# Allegro board kvp_03v4.brd
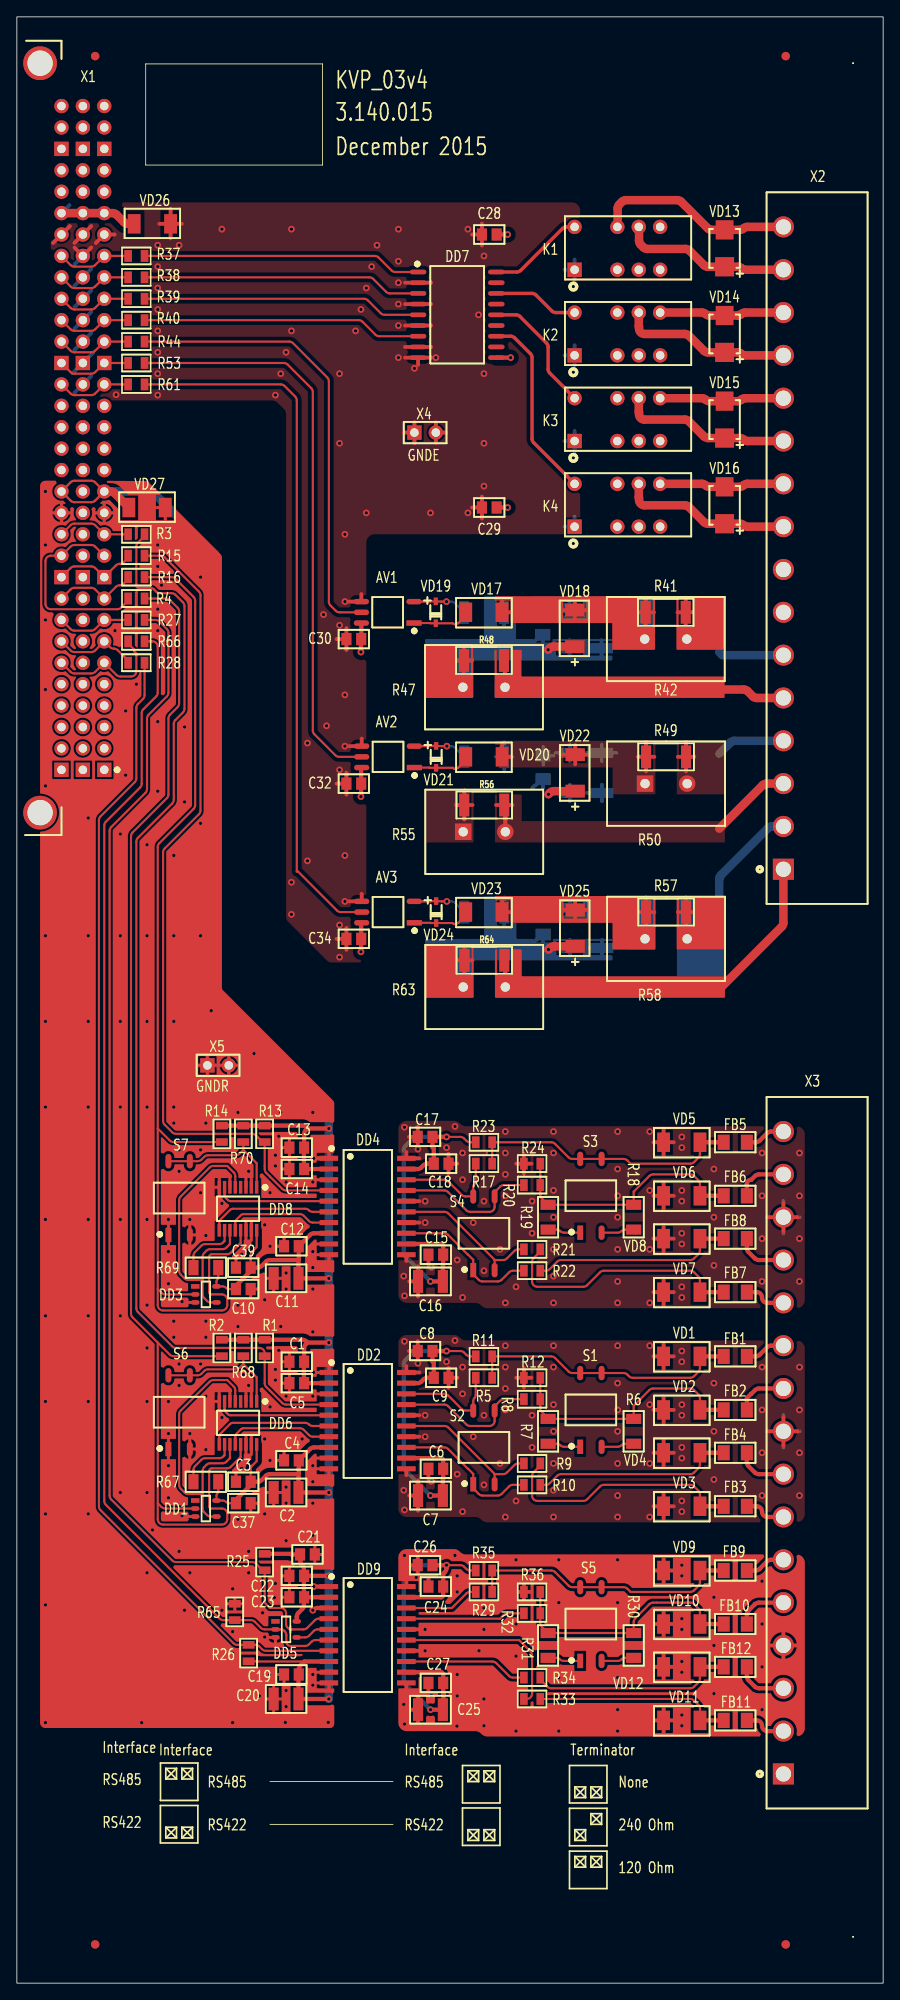
[diagram p0: board, top side]
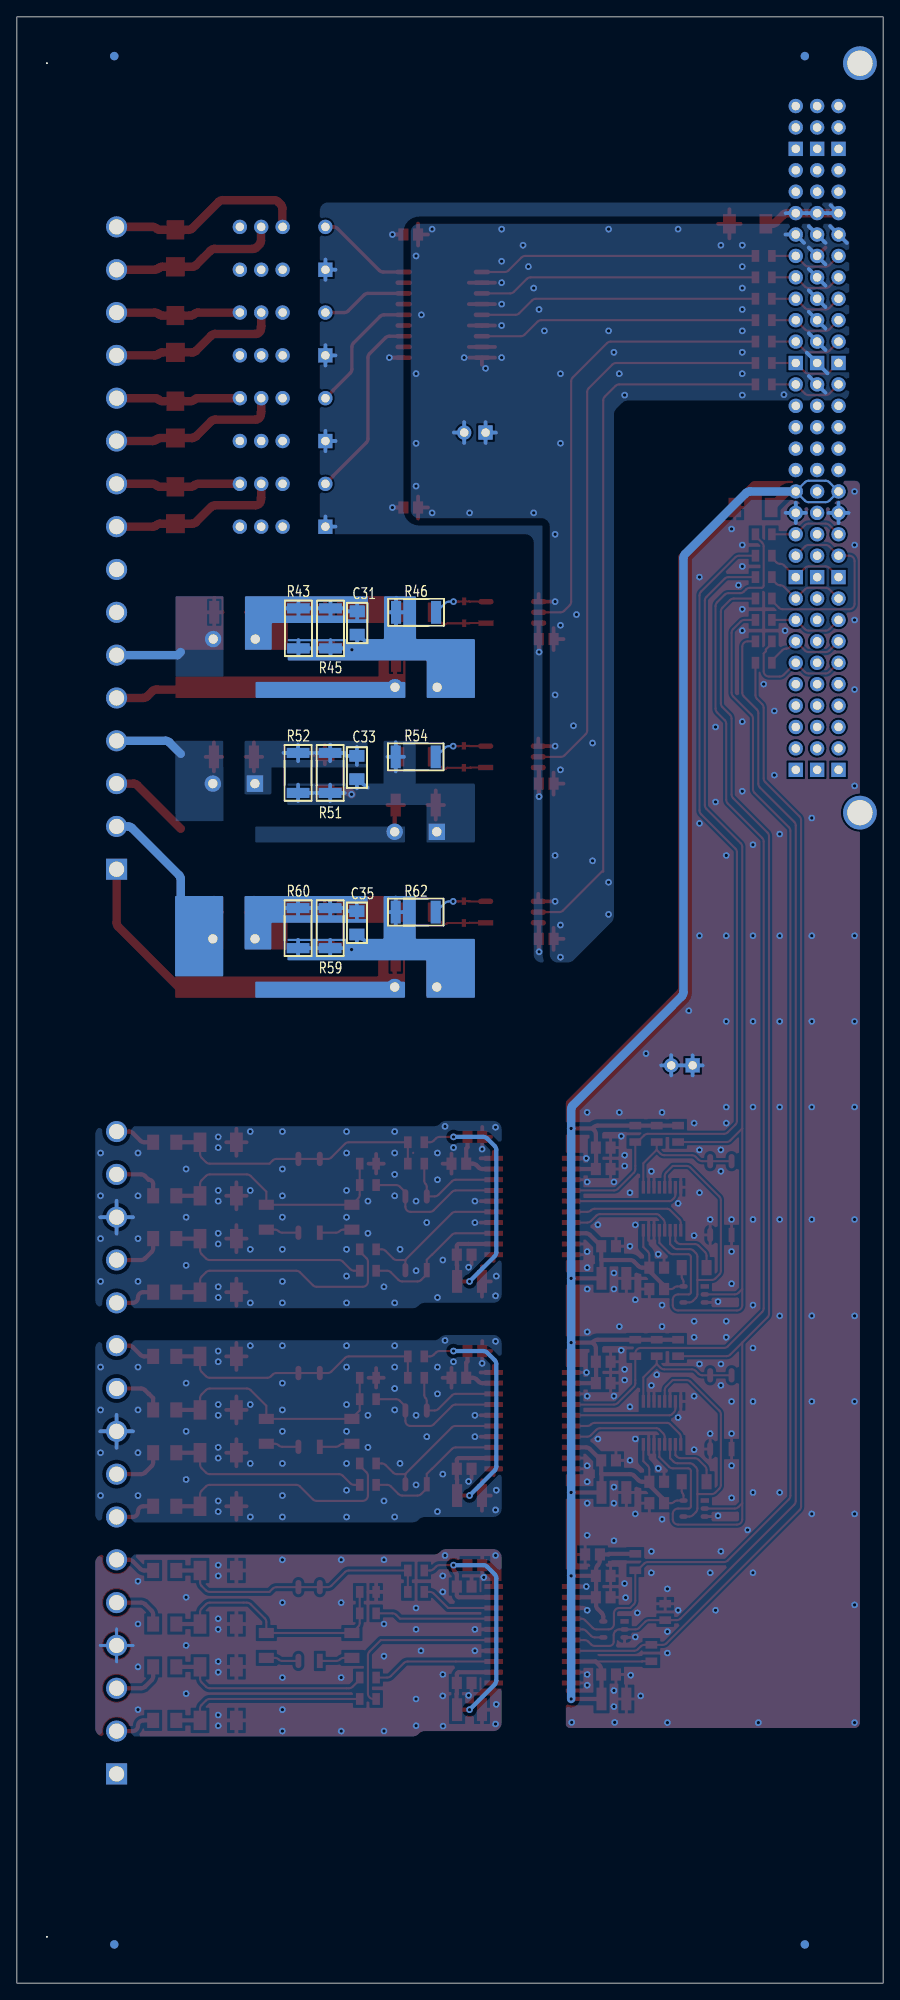
[diagram p1: board, bottom side, seen from below]

Outline 102.87 x 233.25 mm; copper layers: TOP, BOTTOM. Coordinates in mm from the lower left corner of the outline.
Outline path: rectangle 0,0 102.87,233.25

## Design rules (mm)
net group PWR: nets +5BR

## Placement (name value [footprint] x y rotation side)
AV1  ACPL-M50L-500E  [SOIC127P700X250-6N]  44.04 162.61 180 top
AV2  ACPL-M50L-500E  [SOIC127P700X250-6N]  44.08 145.47 180 top
AV3  ACPL-M50L-500E  [SOIC127P700X250-6N]  44.08 127.05 180 top
C1  0.1uF  [CAPC2012X130N]  33.24 73.71 180 top
C2  10uF  [CAPC3225X120N]  31.97 58.21 180 top
C3  0.1uF  [CAPC2012X130N]  26.89 59.48 180 top
C4  0.1uF  [CAPC2012X130N]  32.61 62.02 180 top
C5  0.01uF  [CAPC2012X130N]  33.24 71.17 180 top
C6  0.1uF  [CAPC2012X130N]  49.75 61.01 180 top
C7  10uF  [CAPC3225X120N]  49.12 57.84 180 top
C8  0.01uF  [CAPC2012X130N]  48.48 74.98 180 top
C9  0.1uF  [CAPC2012X130N]  50.39 71.81 0 top
C10  0.1uF  [CAPC2012X130N]  26.89 82.34 0 top
C11  10uF  [CAPC3225X120N]  31.97 83.61 180 top
C12  0.1uF  [CAPC2012X130N]  32.61 87.42 180 top
C13  0.1uF  [CAPC2012X130N]  33.24 99.11 180 top
C14  0.01uF  [CAPC2012X130N]  33.24 96.57 180 top
C15  0.1uF  [CAPC2012X130N]  49.75 86.41 180 top
C16  10uF  [CAPC3225X120N]  49.12 83.24 180 top
C17  0.01uF  [CAPC2012X130N]  48.48 100.38 180 top
C18  0.1uF  [CAPC2012X130N]  50.39 97.21 0 top
C19  0.1uF  [CAPC2012X130N]  32.61 36.62 180 top
C20  10uF  [CAPC3225X120N]  31.97 33.71 180 top
C21  0.1uF  [CAPC2012X130N]  34.51 50.85 0 top
C22  0.1uF  [CAPC2012X130N]  33.24 48.31 180 top
C23  0.01uF  [CAPC2012X130N]  33.24 45.77 180 top
C24  0.1uF  [CAPC2012X130N]  49.75 47.04 180 top
C25  10uF  [CAPC3225X120N]  49.12 32.44 180 top
C26  0.01uF  [CAPC2012X130N]  48.48 49.58 180 top
C27  0.1uF  [CAPC2012X130N]  49.75 35.61 180 top
C28  0.1uF  [CAPC2012X130N]  56.1 207.43 180 top
C29  0.1uF  [CAPC2012X130N]  56.1 175.05 180 top
C30  0.1uF  [CAPC2012X130N]  40.01 159.44 180 top
C31  0.1uF  [CAPC3216X110N]  62.45 161.34 270 bottom
C32  0.1uF  [CAPC2012X130N]  40.01 142.29 180 top
C33  0.1uF  [CAPC3216X110N]  62.49 144.2 270 bottom
C34  0.1uF  [CAPC2012X130N]  40.01 123.88 180 top
C35  0.1uF  [CAPC3216X110N]  62.49 125.78 270 bottom
C37  0.1uF  [CAPC2012X130N]  26.89 56.94 0 top
C39  0.1uF  [CAPC2012X130N]  26.89 84.88 180 top
DD1  SN74LVC1G14DBV  [SOT95P280X112-5N]  22.45 56.3 0 top
DD2  ADM2587  [SOIC127P1032X265-20]  37.05 72.44 270 top
DD3  SN74LVC1G14DBV  [SOT95P280X112-5N]  22.45 81.7 0 top
DD4  ADM2587  [SOIC127P1032X265-20]  37.05 97.84 270 top
DD5  SN74LVC1G14DBV  [SOT95P280X112-5N]  31.97 41.96 0 top
DD6  IDTQS3257Q  [SOP65P600X172-16]  28.48 69.01 270 top
DD7  ULN2803ADW  [SOIC127P1030X265-18N]  52.29 197.91 0 top
DD8  IDTQS3257Q  [SOP65P600X172-16]  28.48 94.41 270 top
DD9  ADM2587  [SOIC127P1032X265-20]  37.05 47.04 270 top
FB1  BLM31PG601SN1  [INDC3216X110N]  85.31 74.35 0 top
FB2  BLM31PG601SN1  [INDC3216X110N]  85.31 68 0 top
FB3  BLM31PG601SN1  [INDC3216X110N]  85.31 56.57 0 top
FB4  BLM31PG601SN1  [INDC3216X110N]  85.31 62.92 0 top
FB5  BLM31PG601SN1  [INDC3216X110N]  85.31 99.75 0 top
FB6  BLM31PG601SN1  [INDC3216X110N]  85.31 93.4 0 top
FB7  BLM31PG601SN1  [INDC3216X110N]  85.31 81.97 0 top
FB8  BLM31PG601SN1  [INDC3216X110N]  85.31 88.32 0 top
FB9  BLM31PG601SN1  [INDC3216X110N]  85.31 48.95 0 top
FB10  BLM31PG601SN1  [INDC3216X110N]  85.31 42.6 0 top
FB11  BLM31PG601SN1  [INDC3216X110N]  85.31 31.17 0 top
FB12  BLM31PG601SN1  [INDC3216X110N]  85.31 37.52 0 top
K1  G6S224DC  [RELAY_G6S224DC]  72.58 205.79 90 top
K2  G6S224DC  [RELAY_G6S224DC]  72.58 195.63 90 top
K3  G6S224DC  [RELAY_G6S224DC]  72.58 185.47 90 top
K4  G6S224DC  [RELAY_G6S224DC]  72.58 175.31 90 top
NOREF  -  []  0 233.25 0 top
NOREF#2  -  [unnamed#2]  9.3 228.6 0 top
NOREF#3  -  [unnamed#3]  99.3 227.75 0 top
NOREF#4  -  [unnamed#3]  99.3 5.5 0 top
NOREF#5  -  []  0 0 90 top
NOREF#6  -  [unnamed#2]  91.3 228.6 0 top
NOREF#7  -  [unnamed#2]  91.3 4.59 0 top
NOREF#8  -  [unnamed#2]  9.3 4.59 0 top
NOREF#9  -  [unnamed#2]  9.3 228.6 180 bottom
NOREF#10  -  [unnamed#2]  91.3 4.59 180 bottom
NOREF#11  -  [unnamed#2]  91.3 228.6 180 bottom
NOREF#12  -  [unnamed#2]  9.3 4.59 180 bottom
R1  10k  [RESC2013X50N]  29.43 75.35 90 top
R2  10k  [RESC2013X50N]  24.35 75.35 90 top
R3  100  [RESC2013X50N]  14.19 171.87 0 top
R4  100  [RESC2013X50N]  14.19 164.25 0 top
R5  5.1  [RESC2013X50N]  55.47 71.81 0 top
R6  240  [RESC3216X50N]  73.25 65.46 270 top
R7  240  [RESC3216X50N]  63.09 65.46 270 top
R8  5.1  [RESC2013X50N]  61.18 69.27 0 top
R9  5.1  [RESC2013X50N]  61.18 61.65 0 top
R10  5.1  [RESC2013X50N]  61.18 59.11 0 top
R11  270  [RESC2013X50N]  55.47 74.35 0 top
R12  270  [RESC2013X50N]  61.18 71.81 0 top
R13  10k  [RESC2013X50N]  29.43 100.75 90 top
R14  10k  [RESC2013X50N]  24.35 100.75 90 top
R15  100  [RESC2013X50N]  14.19 169.33 0 top
R16  100  [RESC2013X50N]  14.19 166.79 0 top
R17  5.1  [RESC2013X50N]  55.47 97.21 0 top
R18  240  [RESC3216X50N]  73.25 90.86 270 top
R19  240  [RESC3216X50N]  63.09 90.86 270 top
R20  5.1  [RESC2013X50N]  61.18 94.67 0 top
R21  5.1  [RESC2013X50N]  61.18 87.05 0 top
R22  5.1  [RESC2013X50N]  61.18 84.51 0 top
R23  270  [RESC2013X50N]  55.47 99.75 0 top
R24  270  [RESC2013X50N]  61.18 97.21 0 top
R25  10k  [RESC2013X50N]  29.43 49.95 90 top
R26  10k  [RESC2013X50N]  27.52 39.16 270 top
R27  100  [RESC2013X50N]  14.19 161.71 0 top
R28  100  [RESC2013X50N]  14.19 156.63 0 top
R29  5.1  [RESC2013X50N]  55.47 46.41 0 top
R30  240  [RESC3216X50N]  73.25 40.06 270 top
R31  240  [RESC3216X50N]  63.09 40.06 270 top
R32  5.1  [RESC2013X50N]  61.18 43.87 0 top
R33  5.1  [RESC2013X50N]  61.18 33.71 0 top
R34  5.1  [RESC2013X50N]  61.18 36.25 0 top
R35  270  [RESC2013X50N]  55.47 48.95 0 top
R36  270  [RESC2013X50N]  61.18 46.41 0 top
R37  6.2k  [RESC2013X50N]  14.19 204.89 0 top
R38  6.2k  [RESC2013X50N]  14.19 202.35 0 top
R39  6.2k  [RESC2013X50N]  14.19 199.81 0 top
R40  6.2k  [RESC2013X50N]  14.19 197.27 0 top
R41  470  [RESC5025X55N]  77.05 162.61 0 top
R42  5.1k  [RESV500P1300W900L2500H]  77.05 159.44 0 top
R43  1.2k  [RESC5025X55N]  69.44 160.71 90 bottom
R44  2k  [RESC2013X50N]  14.19 194.73 0 top
R45  1k  [RESC5025X55N]  65.62 160.71 90 bottom
R46  100  [RESC5025X55N]  55.47 162.61 0 bottom
R47  5.1k  [RESV500P1300W900L2500H]  55.47 153.72 0 top
R48  470  [RESC5025X55N]  55.47 156.9 0 top
R49  470  [RESC5025X55N]  77.09 145.47 0 top
R50  5.1k  [RESV500P1300W900L2500H]  77.09 142.29 0 top
R51  1k  [RESC5025X55N]  65.66 143.56 90 bottom
R52  1.2k  [RESC5025X55N]  69.47 143.56 90 bottom
R53  2k  [RESC2013X50N]  14.19 192.19 0 top
R54  100  [RESC5025X55N]  55.51 145.47 0 bottom
R55  5.1k  [RESV500P1300W900L2500H]  55.51 136.58 0 top
R56  470  [RESC5025X55N]  55.51 139.75 0 top
R57  470  [RESC5025X55N]  77.09 127.05 0 top
R58  5.1k  [RESV500P1300W900L2500H]  77.09 123.88 0 top
R59  1k  [RESC5025X55N]  65.66 125.15 90 bottom
R60  1.2k  [RESC5025X55N]  69.47 125.15 90 bottom
R61  2k  [RESC2013X50N]  14.19 189.65 0 top
R62  100  [RESC5025X55N]  55.51 127.05 0 bottom
R63  5.1k  [RESV500P1300W900L2500H]  55.51 118.16 0 top
R64  470  [RESC5025X55N]  55.51 121.34 0 top
R65  10k  [RESC2013X50N]  25.88 44.04 270 top
R66  100  [RESC2013X50N]  14.19 159.17 0 top
R67  0  [RESC3216X50N]  22.45 59.48 180 top
R68  10k  [RESC2013X50N]  26.89 75.35 270 top
R69  0  [RESC3216X50N]  22.45 84.88 180 top
R70  10k  [RESC2013X50N]  26.89 100.75 270 top
S1  SmWDL-02  [SW_SMWDL-02]  68.16 68 0 top
S2  SmWDL-02  [SW_SMWDL-02]  55.47 63.55 0 top
S3  SmWDL-02  [SW_SMWDL-02]  68.16 93.4 0 top
S4  SmWDL-02  [SW_SMWDL-02]  55.47 88.95 0 top
S5  SmWDL-02  [SW_SMWDL-02]  68.16 42.6 0 top
S6  SmWDL-02  [SW_SMWDL-02]  19.27 67.73 0 top
S7  SmWDL-02  [SW_SMWDL-02]  19.27 93.13 0 top
VD1  6V8  [DIOM5336X265N_V1]  78.96 74.35 0 top
VD2  6V8  [DIOM5336X265N_V1]  78.96 68 0 top
VD3  6V8  [DIOM5336X265N_V1]  78.96 56.57 0 top
VD4  6V8  [DIOM5336X265N_V1]  78.96 62.92 0 top
VD5  6V8  [DIOM5336X265N_V1]  78.96 99.75 0 top
VD6  6V8  [DIOM5336X265N_V1]  78.96 93.4 0 top
VD7  6V8  [DIOM5336X265N_V1]  78.96 81.97 0 top
VD8  6V8  [DIOM5336X265N_V1]  78.96 88.32 0 top
VD9  6V8  [DIOM5336X265N_V1]  78.96 48.95 0 top
VD10  6V8  [DIOM5336X265N_V1]  78.96 42.6 0 top
VD11  6V8  [DIOM5336X265N_V1]  78.96 31.17 0 top
VD12  6V8  [DIOM5336X265N_V1]  78.96 37.52 0 top
VD13  P6SMB300CA  [DIOM5436X230N]  84.04 205.79 270 top
VD14  P6SMB300CA  [DIOM5436X230N]  84.04 195.63 270 top
VD15  P6SMB300CA  [DIOM5436X230N]  84.04 185.47 270 top
VD16  P6SMB300CA  [DIOM5436X230N]  84.04 175.31 270 top
VD17  6V8  [DIOM5336X265N_V1]  55.47 162.61 0 top
VD18  18B  [DIOM5336X265N]  66.26 160.71 270 top
VD19  1N4148WS  [SOD2513X100N]  49.75 162.61 90 top
VD20  6V8  [DIOM5336X265N_V1]  55.47 145.47 0 top
VD21  1N4148WS  [SOD2513X100N]  49.79 145.47 90 top
VD22  18B  [DIOM5336X265N]  66.3 143.56 270 top
VD23  6V8  [DIOM5336X265N_V1]  55.47 127.05 0 top
VD24  1N4148WS  [SOD2513X100N]  49.79 127.05 90 top
VD25  18B  [DIOM5336X265N]  66.3 125.15 270 top
VD26  30B  [DIOM5336X265N_V1]  16.09 208.7 180 top
VD27  6V8  [DIOM5336X265N_V1]  15.46 175.05 180 top
X1  DIN 3x32 96MR  [AUK_DIN_3X32_96MR]  5.3 143.93 90 top
X2  231-576/001-000  [WAGO_231-576]  91.02 132.13 90 top
X3  231-576/001-000  [WAGO_231-576]  91.02 24.82 90 top
X4  GNDE  [PLS-2]  47.21 183.94 0 top
X5  GNDR  [PLS-2]  22.62 108.87 0 top

## Library data of the parts
AV1-AV3 = ACPL-M50L
C1-C35 C37 C39 = CAPACITOR
DD1 DD3 DD5 = SN74LVC1G14_v1
DD2 DD4 DD9 = ADM2582E_RW20
DD6 DD8 = IDTQS3257Q_4
DD7 = ULN2803A
FB1-FB12 = INDUCTOR
K1-K4 = G6S224DC
R1-R5 R8-R17 R20-R29 R32-R40 R44 R53 R61 R65 R66 R68 R70 = R_0.125W
R6 R7 R18 R19 R30 R31 R67 R69 = R_0.25W
R41 R43 R45 R46 R48 R49 R51 R52 R54 R56 R57 R59 R60 R62 R64 = R_0.75W
R42 R47 R50 R55 R58 R63 = RES_5W
S1-S7 = SWITCH_2
VD1-VD17 VD20 VD23 VD26 VD27 = SUPRESSOR
VD18 VD22 VD25 = SUPRESSOR_POL
VD19 VD21 VD24 = DIODE
X1 = DIN96_ABC_0
X2 X3 = CONN16
X4 X5 = CONN2

## Footprints (pads in the part's own frame, mm; a bottom-side part is the same pattern mirrored in y, then rotated)
AUK_DIN_3X32_96MR
  rect 1.7x1.7 hole 1: A1(0,0) A10(22.86,0) A20(48.26,0) A30(73.66,0) B1(0,-2.54) B10(22.86,-2.54) B20(48.26,-2.54) B30(73.66,-2.54) C1(0,-5.08) C10(22.86,-5.08) C20(48.26,-5.08) C30(73.66,-5.08)
  round 1.7 hole 1: A2(2.54,0) A3(5.08,0) A4(7.62,0) A5(10.16,0) A6(12.7,0) A7(15.24,0) A8(17.78,0) A9(20.32,0) A11(25.4,0) A12(27.94,0) A13(30.48,0) A14(33.02,0) A15(35.56,0) A16(38.1,0) A17(40.64,0) A18(43.18,0) A19(45.72,0) A21(50.8,0) A22(53.34,0) A23(55.88,0) A24(58.42,0) A25(60.96,0) A26(63.5,0) A27(66.04,0) A28(68.58,0) A29(71.12,0) A31(76.2,0) A32(78.74,0) B2(2.54,-2.54) B3(5.08,-2.54) B4(7.62,-2.54) B5(10.16,-2.54) B6(12.7,-2.54) B7(15.24,-2.54) B8(17.78,-2.54) B9(20.32,-2.54) B11(25.4,-2.54) B12(27.94,-2.54) B13(30.48,-2.54) B14(33.02,-2.54) B15(35.56,-2.54) B16(38.1,-2.54) B17(40.64,-2.54) B18(43.18,-2.54) B19(45.72,-2.54) B21(50.8,-2.54) B22(53.34,-2.54) B23(55.88,-2.54) B24(58.42,-2.54) B25(60.96,-2.54) B26(63.5,-2.54) B27(66.04,-2.54) B28(68.58,-2.54) B29(71.12,-2.54) B31(76.2,-2.54) B32(78.74,-2.54) C2(2.54,-5.08) C3(5.08,-5.08) C4(7.62,-5.08) C5(10.16,-5.08) C6(12.7,-5.08) C7(15.24,-5.08) C8(17.78,-5.08) C9(20.32,-5.08) C11(25.4,-5.08) C12(27.94,-5.08) C13(30.48,-5.08) C14(33.02,-5.08) C15(35.56,-5.08) C16(38.1,-5.08) C17(40.64,-5.08) C18(43.18,-5.08) C19(45.72,-5.08) C21(50.8,-5.08) C22(53.34,-5.08) C23(55.88,-5.08) C24(58.42,-5.08) C25(60.96,-5.08) C26(63.5,-5.08) C27(66.04,-5.08) C28(68.58,-5.08) C29(71.12,-5.08) C31(76.2,-5.08) C32(78.74,-5.08)
  round 4 hole 3: SHIELD1(-5.08,2.54) SHIELD2(83.82,2.54)
CAPC2012X130N
  rect 1.2x1.45 smd: 1(-0.875,0) 2(0.875,0)
CAPC3216X110N
  rect 1.4x1.8 smd: 1(-1.385,0) 2(1.385,0)
CAPC3225X120N
  rect 1.2x2.7 smd: 1(-1.475,0) 2(1.475,0)
DIOM5336X265N
  rect 1.52x2.3 smd: 1(-2.162,0) 2(2.162,0)
DIOM5336X265N_V1
  rect 1.52x2.3 smd: 1(-2.162,0) 2(2.162,0)
DIOM5436X230N
  rect 2.275x2.1 smd: 1(-2.188,0)
  rect 2.275x2.25 smd: 2(2.188,0)
INDC3216X110N
  rect 1.425x1.8 smd: 1(-1.375,0) 2(1.375,0)
PLS-2
  rect 1.7x1.7 hole 1: 1(0,0)
  round 1.7 hole 1: 2(2.54,0)
RELAY_G6S224DC
  rect 1.7x1.7 hole 1: 1(-2.54,6.35)
  round 1.7 hole 1: 3(-2.54,1.27) 4(-2.54,-1.27) 5(-2.54,-3.81) 8(2.54,-3.81) 9(2.54,-1.27) 10(2.54,1.27) 12(2.54,6.35)
RESC2013X50N
  rect 0.9x1.4 smd: 1(-0.975,0) 2(0.975,0)
RESC3216X50N
  rect 1.2x1.8 smd: 1(-1.475,0) 2(1.475,0)
RESC5025X55N
  rect 1.2x2.7 smd: 1(-2.375,0) 2(2.375,0)
RESV500P1300W900L2500H
  rect 1.95x1.95 hole 1.1: 1(-2.5,0)
  round 1.95 hole 1.1: 2(2.5,0)
SOD2513X100N
  rect 0.9x0.5 smd: A(1.3,0) C(-1.3,0)
SOIC127P700X250-6N
  rect 1.8x0.64 smd: 1(-3.125,1.27)
  oval 1.8x0.64 smd: 3(-3.125,-1.27) 4(3.125,-1.27) 5(3.125,0) 6(3.125,1.27)
SOIC127P1030X265-18N
  oval 1.95x0.55 smd: 1(-4.645,5.08) 2(-4.645,3.81) 3(-4.645,2.54) 4(-4.645,1.27) 5(-4.645,0) 6(-4.645,-1.27) 7(-4.645,-2.54) 8(-4.645,-3.81) 9(-4.645,-5.08) 10(4.645,-5.08) 11(4.645,-3.81) 12(4.645,-2.54) 13(4.645,-1.27) 14(4.645,0) 15(4.645,1.27) 16(4.645,2.54) 17(4.645,3.81) 18(4.645,5.08)
SOIC127P1032X265-20
  rect 0.6x2.2 smd: 1(0,0) 2(1.27,0) 3(2.54,0) 4(3.81,0) 5(5.08,0) 6(6.35,0) 7(7.62,0) 8(8.89,0) 9(10.16,0) 10(11.43,0) 11(11.43,9.2) 12(10.16,9.2) 13(8.89,9.2) 14(7.62,9.2) 15(6.35,9.2) 16(5.08,9.2) 17(3.81,9.2) 18(2.54,9.2) 19(1.27,9.2) 20(0,9.2)
SOP65P600X172-16
  rect 1.5x0.4 smd: 1(0,0) 2(0,-0.635) 3(0,-1.27) 4(0,-1.905) 5(0,-2.54) 6(0,-3.175) 7(0,-3.81) 8(0,-4.445) 9(5.1,-4.445) 10(5.1,-3.81) 11(5.1,-3.175) 12(5.1,-2.54) 13(5.1,-1.905) 14(5.1,-1.27) 15(5.1,-0.635) 16(5.1,0)
SOT95P280X112-5N
  rect 1x0.55 smd: 1(-1.262,0.95)
  oval 1x0.55 smd: 2(-1.262,0) 3(-1.262,-0.95) 4(1.262,-0.95) 5(1.262,0.95)
SW_SMWDL-02
  rect 0.7x1.7 smd: 1(-1.27,-4.375)
  oval 0.7x1.7 smd: 2(1.27,-4.375) 3(1.27,4.375) 4(-1.27,4.375)
unnamed#2
  round 1 smd: (0,0)
unnamed#3
  round 0.2 hole 2.7 unplated: (0,0)
WAGO_231-576
  rect 2.5x2.5 hole 1.8: 1(0,0)
  round 2.5 hole 1.8: 2(5.08,0) 3(10.16,0) 4(15.24,0) 5(20.32,0) 6(25.4,0) 7(30.48,0) 8(35.56,0) 9(40.64,0) 10(45.72,0) 11(50.8,0) 12(55.88,0) 13(60.96,0) 14(66.04,0) 15(71.12,0) 16(76.2,0)

## Nets
GNDE: AV1.4(GND) AV2.4(GND) AV3.4(GND) C28.2 C29.2 C30.2 C32.2 C34.2 DD7.2(2B) DD7.4(4B) DD7.6(6B) DD7.8(8B) DD7.9(GND) VD26.1(ANODE) X1.A26 X1.B19 X1.B20 X1.B21 X1.B22 X1.B23 X1.B24 X1.B25 X1.B26 X1.C26 X4.1 X4.2
GNDR: C1.2 C2.2 C3.2 C4.2 C5.2 C10.2 C11.2 C12.2 C13.2 C14.2 C19.2 C20.2 C21.2 C22.2 C23.2 C37.2 C39.2 DD1.3(GND) DD2.1(GND1#0) DD2.3(GND1#1) DD2.9(GND1#2) DD2.10(GND1#3) DD3.3(GND) DD4.1(GND1#0) DD4.3(GND1#1) DD4.9(GND1#2) DD4.10(GND1#3) DD5.3(GND) DD6.2(IN0A) DD6.3(IN1A) DD6.6(IN1B) DD6.8(GND) DD6.14(IN0D) DD6.15(E\) DD8.2(IN0A) DD8.3(IN1A) DD8.6(IN1B) DD8.8(GND) DD8.14(IN0D) DD8.15(E\) DD9.1(GND1#0) DD9.3(GND1#1) DD9.9(GND1#2) DD9.10(GND1#3) R65.1 S6.1(N) S6.2(N) S7.1(N) S7.2(N) VD27.1(ANODE) X1.A13 X1.C13 X5.1 X5.2
1#B_A4: DD2.17(B\) R8.1 S2.3(ON)
1#B_A5: DD4.17(B\) R20.1 S4.3(ON)
1#B_A6: DD9.17(B\) R32.1
1#PRD: DD7.14(5C) K3.12(IN-)
1#PRM: DD7.12(7C) K4.12(IN-)
1#WARN: DD7.16(3C) K2.12(IN-)
1#Z_A4: DD2.15(Z\) R9.1 S2.2(N)
1#Z_A5: DD4.15(Z\) R21.1 S4.2(N)
1#Z_A6: DD9.15(Z\) R33.1
1A_A4: DD2.18(A) R5.1 S2.4(ON)
1A_A5: DD4.18(A) R17.1 S4.4(ON)
1A_A6: DD9.18(A) R29.1
1ALARM: DD7.18(1C) K1.12(IN-)
1Y_A4: DD2.13(Y) R10.1 S2.1(N)
1Y_A5: DD4.13(Y) R22.1 S4.1(N)
1Y_A6: DD9.13(Y) R34.1
#PRD: R39.1 X1.A23 X1.C23
#PRM: R40.1 X1.A22 X1.C22
#RE: DD5.4(OUT) DD9.5(R\E\)
#WARN: R38.1 X1.A24 X1.C24
+5BR: C1.1 C2.1 C3.1 C4.1 C5.1 C10.1 C11.1 C12.1 C13.1 C14.1 C19.1 C20.1 C21.1 C22.1 C23.1 C37.1 C39.1 DD1.5(VCC) DD2.2(VCC#0) DD2.8(VCC#1) DD3.5(VCC) DD4.2(VCC#0) DD4.8(VCC#1) DD5.5(VCC) DD6.16(VCC) DD8.16(VCC) DD9.2(VCC#0) DD9.8(VCC#1) R1.2 R2.2 R13.2 R14.2 R25.2 R26.2 R67.1 R68.1 R69.1 R70.1 VD27.2(CATHODE) X1.A14 X1.C14
+24BE: AV1.6(VCC) AV2.6(VCC) AV3.6(VCC) C28.1 C29.1 C30.1 C32.1 C34.1 DD7.10(COM) K1.1(IN+) K2.1(IN+) K3.1(IN+) K4.1(IN+) VD26.2(CATHODE) X1.A27 X1.B27 X1.C27
_#RE_A4: DD2.5(R\E\) DD6.7(OUTB)
_#RE_A5: DD4.5(R\E\) DD8.7(OUTB)
_#TXD_A4: DD2.7(TXD) DD6.12(OUTD)
_#TXD_A5: DD4.7(TXD) DD8.12(OUTD)
_#TXD_A6: DD9.7(TXD) R26.1 R28.2
_DE_A4: DD2.6(DE) DD6.9(OUTC)
_DE_A5: DD4.6(DE) DD8.9(OUTC)
_KCLR+: C33.1 R49.1 R50.1 R51.2 R52.2 VD20.2(CATHODE) VD22.1(CATHODE)
_KCLR-: C33.2 R51.1 R52.1 R54.2 R55.1 R56.1 VD22.2(ANODE)
_KPUSK+: C31.1 R41.1 R42.1 R43.2 R45.2 VD17.2(CATHODE) VD18.1(CATHODE)
_KPUSK-: C31.2 R43.1 R45.1 R46.2 R47.1 R48.1 VD18.2(ANODE)
_KTM+: C35.1 R57.1 R58.1 R59.2 R60.2 VD23.2(CATHODE) VD25.1(CATHODE)
_KTM-: C35.2 R59.1 R60.1 R62.2 R63.1 R64.1 VD25.2(ANODE)
_RXD_A4: DD2.4(RXD) R1.1 R3.2
_RXD_A5: DD4.4(RXD) R13.1 R15.2
_RXD_A6: DD9.4(RXD) R25.1 R27.2
ALARM: R37.1 X1.A25 X1.C25
CLEAR: R53.1 X1.A20 X1.C20
CTRLTM: R61.1 X1.A19 X1.C19
DE: DD5.2(IN1) DD9.6(DE) R65.2 R66.2
ENDR: R66.1 X1.A6 X1.C6
KALARM+: K1.10(NC2) VD13.1(ANODE) X2.16
KALARM-: K1.9(02) VD13.2(CATHODE) X2.15
KCLEAR+: R49.2 R50.2 X2.4
KCLEAR-: R55.2 R56.2 X2.3
KCTRLTM+: R57.2 R58.2 X2.2
KCTRLTM-: R63.2 R64.2 X2.1
KDR_COM: C24.2 C25.2 C26.2 C27.2 DD9.11(GND2#0) DD9.14(GND2#1) DD9.16(GND2#2) DD9.20(GND2#3) R36.1 VD9.1(ANODE) VD10.1(ANODE) VD11.1(ANODE) VD12.1(ANODE) X3.4
KLN_COM: C15.2 C16.2 C17.2 C18.2 DD4.11(GND2#0) DD4.14(GND2#1) DD4.16(GND2#2) DD4.20(GND2#3) R24.1 VD5.1(ANODE) VD6.1(ANODE) VD7.1(ANODE) VD8.1(ANODE) X3.14
KPRD+: K3.8(NO2) VD15.1(ANODE) X2.12
KPRD-: K3.9(02) VD15.2(CATHODE) X2.11
KPRM+: K4.8(NO2) VD16.1(ANODE) X2.10
KPRM-: K4.9(02) VD16.2(CATHODE) X2.9
KPUSK+: R41.2 R42.2 X2.6
KPUSK-: R47.2 R48.2 X2.5
KRXDR+: FB9.2 X3.6
KRXDR-: FB10.2 X3.5
KRXLN+: FB5.2 X3.16
KRXLN-: FB6.2 X3.15
KRXTM+: FB1.2 X3.11
KRXTM-: FB2.2 X3.10
KTM_COM: C6.2 C7.2 C8.2 C9.2 DD2.11(GND2#0) DD2.14(GND2#1) DD2.16(GND2#2) DD2.20(GND2#3) R12.1 VD1.1(ANODE) VD2.1(ANODE) VD3.1(ANODE) VD4.1(ANODE) X3.9
KTXDR+: FB12.2 X3.3
KTXDR-: FB11.2 X3.2
KTXLN+: FB8.2 X3.13
KTXLN-: FB7.2 X3.12
KTXTM+: FB4.2 X3.8
KTXTM-: FB3.2 X3.7
KWARN+: K2.8(NO2) VD14.1(ANODE) X2.14
KWARN-: K2.9(02) VD14.2(CATHODE) X2.13
N119917_A4: FB3.1 R9.2 VD3.2(CATHODE)
N119917_A5: FB7.1 R21.2 VD7.2(CATHODE)
N120049_A4: FB2.1 R6.1 R7.1 R8.2 R12.2 VD2.2(CATHODE)
N120049_A5: FB6.1 R18.1 R19.1 R20.2 R24.2 VD6.2(CATHODE)
N120129_A4: FB1.1 R5.2 R11.2 S1.3(ON) S1.4(ON) VD1.2(CATHODE)
N120129_A5: FB5.1 R17.2 R23.2 S3.3(ON) S3.4(ON) VD5.2(CATHODE)
N120167_A4: DD1.2(IN1) DD6.13(IN1D) R2.1 R4.2
N120167_A5: DD3.2(IN1) DD8.13(IN1D) R14.1 R16.2
N120955_A4: FB4.1 R10.2 VD4.2(CATHODE)
N120955_A5: FB8.1 R22.2 VD8.2(CATHODE)
N120959_A4: R6.2 S1.2(N)
N120959_A5: R18.2 S3.2(N)
N121291_A4: R7.2 S1.1(N)
N121291_A5: R19.2 S3.1(N)
N261454_A4: DD1.4(OUT) DD6.5(IN0B) DD6.11(IN0C)
N261454_A5: DD3.4(OUT) DD8.5(IN0B) DD8.11(IN0C)
N262793_A4: DD6.1(S) R68.2 S6.3(ON) S6.4(ON)
N262793_A5: DD8.1(S) R70.2 S7.3(ON) S7.4(ON)
N265187_A4: DD6.10(IN1C) R67.2
N265187_A5: DD8.10(IN1C) R69.2
PUSK: R44.1 X1.A21 X1.C21
RXDR: R27.1 X1.A8 X1.C8
RXLN: R15.1 X1.A10 X1.C10
RXTM: R3.1 X1.A12 X1.C12
TXDR: R28.1 X1.A7 X1.C7
TXLN: R16.1 X1.A9 X1.C9
TXTM: R4.1 X1.A11 X1.C11
VISO_A4: C6.1 C7.1 C8.1 C9.1 DD2.12(VISOOUT) DD2.19(VISOIN) R11.1
VISO_A5: C15.1 C16.1 C17.1 C18.1 DD4.12(VISOOUT) DD4.19(VISOIN) R23.1
VISO_A6: C24.1 C25.1 C26.1 C27.1 DD9.12(VISOOUT) DD9.19(VISOIN) R35.1
N519920: FB11.1 R33.2 VD11.2(CATHODE)
N520002: FB10.1 R30.1 R31.1 R32.2 R36.2 VD10.2(CATHODE)
N520106: FB9.1 R29.2 R35.2 S5.3(ON) S5.4(ON) VD9.2(CATHODE)
N520544: AV2.5(VO) R53.2
N520576: AV2.1(ANODE) VD20.1(ANODE) VD21.C
N520588: AV2.3(CATHODE) R54.1 VD21.A
N520864: FB12.1 R34.2 VD12.2(CATHODE)
N521014: AV3.1(ANODE) VD23.1(ANODE) VD24.C
N521018: AV3.3(CATHODE) R62.1 VD24.A
N521132: R30.2 S5.2(N)
N521180: R31.2 S5.1(N)
N521452: DD7.1(1B) R37.2
N521460: DD7.7(7B) R40.2
N521468: DD7.5(5B) R39.2
N522000: AV1.1(ANODE) VD17.1(ANODE) VD19.C
N522004: AV1.3(CATHODE) R46.1 VD19.A
N522588: DD7.3(3B) R38.2
N533905: AV1.5(VO) R44.2
N534866: AV3.5(VO) R61.2

Pads without a net: DD1 1; DD3 1; DD5 1; DD6 4; DD7 11 13 15 17; DD8 4; K1 3 4 5 8; K2 3 4 5 10; K3 3 4 5 10; K4 3 4 5 10; X1 A1 A2 A3 A4 A5 A15 A16 A17 A18 A28 A29 A30 A31 A32 B1 B2 B3 B4 B5 B6 B7 B8 B9 B10 B11 B12 B13 B14 B15 B16 B17 B18 B28 B29 B30 B31 B32 C1 C2 C3 C4 C5 C15 C16 C17 C18 C28 C29 C30 C31 C32 SHIELD1 SHIELD2; X2 7 8; X3 1

## Via types
v1: diameter 0.8, hole 0.4, TOP to BOTTOM, 414 vias

## Routing (per net, layer and track width the routed paths; a pad name or vN(x,y) marks a point on that pad's centre or on a via; arc(x,y) is an arc through that point)
GNDE: length 102.9
  TOP w0.45: 46.09,201.72 49.2,201.72 ; DD7.9 49.2,192.83 ; DD7.9 46.09,192.83 ; DD7.9 47.65,191.97 ; 55.23,206.13 C28.2 ; C28.2 55.23,208.73 ; C28.2 54.05,207.43 ; 39.13,122.58 C34.2 ; C34.2 37.96,123.88 ; C34.2 39.13,125.18 ; 37.96,142.29 C32.2 ; C32.2 39.13,140.99 ; C32.2 39.13,143.6 ; 49.2,194.09 DD7.8 46.09,194.09 ; 37.96,159.44 C30.2 ; C30.2 39.13,158.14 ; C30.2 39.13,160.74 ; X4.2 49.75,185.16 ; X4.2 49.75,182.71 ; X4.2 50.98,183.94 ; 46.09,196.63 DD7.6 49.2,196.63 ; 6.29,208.42 X1.A26 4.31,206.44 ; 40.95,147.64 AV2.4 39.47,146.74 ; 18.26,206.97 VD26.1 ; VD26.1 16.92,208.7 ; VD26.1 18.26,210.43 ; VD26.1 19.59,208.7 ; X4.1 47.21,185.16 ; X4.1 45.98,183.94 ; X4.1 47.21,182.71 ; 46.09,199.18 49.2,199.18 ; 39.47,128.32 AV3.4 40.95,129.22 ; 9.39,206.44 X1.C26 11.61,207.43 ; 39.43,163.88 AV1.4 40.91,164.78 ; C29.2 55.23,176.35 ; C29.2 55.23,173.74 ; C29.2 54.05,175.05 ; 6.85,205.88 X1.B25 8.83,205.88 ; 8.83,208.42 X1.B26 6.85,206.44
  BOTTOM w0.45: 8.83,195.72 X1.B21 6.85,193.74 ; 8.83,200.8 X1.B23 6.85,198.82 ; X4.2 50.98,183.94 ; X4.2 49.75,185.16 ; X4.2 49.75,182.71 ; 6.29,208.42 X1.A26 4.31,206.44 ; 8.83,203.34 X1.B24 6.85,201.36 ; 8.83,208.42 X1.B26 6.85,206.44 ; X4.1 47.21,185.16 ; X4.1 47.21,182.71 ; X4.1 45.98,183.94 ; 8.83,205.88 X1.B25 6.85,203.9 ; 9.07,193.42 X1.B20 6.61,190.96 ; 11.61,207.43 X1.C26 9.39,206.44 ; 6.85,196.28 X1.B22 8.83,198.26 ; 6.85,188.66 X1.B19 8.83,190.64
  vias: v1(11.78,188.43) v1(16.73,206.16) v1(16.73,203.62) v1(16.73,201.08) v1(16.73,198.54) v1(16.73,196) v1(16.73,193.46) v1(16.73,190.92) v1(16.73,188.38) v1(19.27,206.16) v1(24.35,208.06) v1(30.7,188.38) v1(31.34,190.92) v1(31.97,193.46) v1(32.61,208.06) v1(32.61,196) v1(32.61,130.59) v1(32.61,126.79) v1(34.51,147.11) v1(34.51,133.14) v1(36.41,162.34) v1(36.78,149.15) v1(38.32,190.92) v1(38.32,182.67) v1(38.32,161.08) v1(38.32,143.93) v1(38.32,125.52) v1(38.32,121.71) v1(38.95,171.87) v1(38.95,163.88) v1(38.95,152.82) v1(38.95,146.74) v1(38.95,133.77) v1(38.95,128.32) v1(40.23,196) v1(40.86,198.54) v1(41.49,201.08) v1(41.49,174.41) v1(42.13,203.62) v1(42.77,206.16) v1(45.3,208.06) v1(45.3,204.25) v1(45.3,201.72) v1(45.3,199.18) v1(45.3,196.63) v1(45.3,192.83) v1(47.21,191.56) v1(49.12,174.41) v1(49.75,192.83) v1(53.56,208.06) v1(53.56,174.41) v1(54.83,197.91) v1(55.47,204.89) v1(55.47,190.92) v1(55.47,182.67) v1(55.47,177.59)
GNDR: length 156.9
  TOP w0.35: 18,87.45 S7.1 18,90.06 ; 30.49,31.91 C20.2 ; C20.2 30.49,35.51 ; C20.2 31.55,33.71 ; C20.2 29.44,33.71 ; R65.1 25.88,45.91 ; R65.1 27.03,45.01 ; R65.1 25.88,44.11 ; R65.1 24.73,45.01 ; 37.05,60.26 DD2.10 35.5,61.01 ; 22.62,107.67 X5.1 ; X5.1 22.62,110.07 ; X5.1 23.83,108.87 ; X5.1 21.42,108.87 ; 27.84,69.01 27.84,70.21 ; C1.2 32.37,74.89 ; C1.2 32.37,72.54 ; C1.2 31.31,73.71 ; 37.05,34.86 DD9.10 35.5,35.61 ; 20.54,87.45 S7.2 ; S7.2 21.34,88.76 ; S7.2 20.54,90.06 ; C21.2 35.38,52.03 ; C21.2 36.44,50.85 ; C21.2 35.38,49.68 ; 29.76,41.01 DD5.3 30.71,40.29 ; 31.31,45.77 C23.2 32.37,46.95 ; 25.3,94.41 25.3,95.61 ; X1.A13 5.3,175.61 ; X1.A13 5.3,173.21 ; X1.A13 6.5,174.41 ; X1.A13 4.1,174.41 ; 27.84,62.71 27.84,65.11 ; 31.31,99.11 C13.2 ; C13.2 32.37,97.94 ; C13.2 32.37,100.29 ; 30.68,87.42 C12.2 31.73,88.59 ; 27.84,90.51 27.84,88.11 ; 37.05,85.66 DD4.10 35.5,86.41 ; 35.5,69.9 DD2.3 ; 17.62,173.44 VD27.1 16.41,175.05 ; 27.84,94.41 27.84,95.61 ; 35.5,36.88 DD9.9 ; 30.68,36.62 C19.2 31.73,35.44 ; 30.68,62.02 C4.2 31.73,63.19 ; X5.2 25.16,110.07 ; X5.2 25.16,107.67 ; X5.2 26.37,108.87 ; X5.2 23.96,108.87 ; 37.05,73.2 DD2.1 35.5,72.44 ; 30.49,56.4 C2.2 ; C2.2 29.44,58.21 ; C2.2 31.55,58.21 ; 35.5,87.68 DD4.9 ; C5.2 32.37,72.35 ; C5.2 31.31,71.17 ; C5.2 32.37,70 ; 28.82,82.34 C10.2 27.77,81.16 ; C14.2 32.37,97.75 ; C14.2 32.37,95.4 ; C14.2 31.31,96.57 ; 25.3,69.01 25.3,70.21 ; 20.23,80.75 21.18,80.75 ; S6.2 21.34,63.36 ; S6.2 20.54,64.66 ; S6.2 20.54,62.05 ; C39.2 26.02,86.05 ; 18,62.05 S6.1 18,64.66 ; 27.21,62.71 DD6.14 27.21,65.11 ; DD6.8 24.03,70.21 ; DD6.8 23.38,69.01 ; DD6.8 24.03,67.81 ; 24.03,93.21 DD8.8 ; DD8.8 23.38,94.41 ; DD8.8 24.03,95.61 ; 9.18,174.41 X1.C13 ; X1.C13 10.38,173.21 ; X1.C13 11.58,174.41 ; X1.C13 10.38,175.61 ; 32.37,47.14 C22.2 ; C22.2 31.31,48.31 ; C22.2 32.37,49.49 ; 27.21,88.11 DD8.14 27.21,90.51 ; DD4.1 37.05,98.6 ; 20.23,55.35 21.18,55.35 ; 27.77,55.76 C37.2 28.82,56.94 ; 35.5,95.3 DD4.3 ; 30.49,81.8 C11.2 ; C11.2 29.44,83.61 ; C11.2 31.55,83.61 ; DD6.3 27.21,70.21 ; DD8.3 27.21,95.61 ; 35.5,62.28 DD2.9 ; C3.2 26.02,60.65
  TOP w0.5: DD4.1 v1(35.25,97.84) ; DD9.1 v1(35.25,47.04) ; DD9.3 35.68,44.5 arc(35.43,44.46) 35.23,44.32 v1(35.15,44.24)
  BOTTOM w0.45: X5.1 23.83,108.87 ; X5.1 22.62,110.07 ; X5.1 22.62,107.67 ; X5.1 21.42,108.87 ; 23.96,108.87 X5.2 ; X5.2 25.16,107.67 ; X5.2 25.16,110.07 ; X5.2 26.37,108.87 ; X1.A13 6.5,174.41 ; X1.A13 5.3,175.61 ; X1.A13 5.3,173.21 ; X1.A13 4.1,174.41 ; 10.38,173.21 X1.C13 ; X1.C13 10.38,175.61 ; X1.C13 9.18,174.41 ; X1.C13 11.58,174.41
  vias: v1(3.4,176.95) v1(3.4,170.6) v1(3.4,161.71) v1(3.4,153.46) v1(3.4,142.03) v1(3.4,124.25) v1(3.4,114.09) v1(3.4,103.93) v1(3.4,90.59) v1(3.4,79.16) v1(3.4,69) v1(3.4,55.67) v1(3.4,44.87) v1(3.4,30.9) v1(8.48,138.22) v1(8.48,124.25) v1(8.48,114.09) v1(8.48,103.93) v1(8.48,90.59) v1(8.48,79.16) v1(8.48,69) v1(8.48,55.67) v1(11.65,160.44) v1(12.29,136.31) v1(12.29,124.25) v1(12.29,114.09) v1(12.29,103.93) v1(12.29,90.59) v1(12.29,79.16) v1(12.29,58.21) v1(12.92,150.92) v1(12.92,143.3) v1(14.19,154.09) v1(14.83,30.9) v1(15.46,135.04) v1(15.46,124.25) v1(15.46,114.09) v1(15.46,103.93) v1(15.46,90.59) v1(15.46,80.43) v1(15.46,75.35) v1(15.46,69) v1(15.46,58.21) v1(15.46,48.68) v1(16.09,53.76) v1(16.73,170.6) v1(16.73,168.06) v1(16.73,162.98) v1(16.73,160.44) v1(16.73,149.65) v1(16.73,141.39) v1(17.18,165.83) v1(18,172.5) v1(18,90.59) v1(18,86.78) v1(18,82.97) v1(18,69) v1(18,65.19) v1(18,61.38) v1(18,57.57) v1(18.64,133.77) v1(18.64,124.25) v1(18.64,114.09) v1(18.64,103.93) v1(18.64,102.02) v1(18.64,78.53) v1(18.64,76.62) v1(19.27,98.84) v1(19.27,96.31) v1(19.27,73.45) v1(19.27,70.91) v1(19.27,51.22) v1(19.61,80.84) v1(19.61,55.44) v1(19.91,149.01) v1(19.91,140.12) v1(19.91,44.24) v1(20.54,90.59) v1(20.54,65.19) v1(20.54,48.68) v1(21.81,166.79) v1(21.81,137.58) v1(21.81,124.25) v1(21.81,98.84) v1(21.81,93.77) v1(21.81,73.45) v1(22.45,102.02) v1(22.45,88.69) v1(22.45,78.53) v1(22.45,76.62) v1(22.45,69.64) v1(22.45,63.29) v1(23.08,115.36) v1(24.35,92.5) v1(24.35,67.1) v1(24.35,44.24) v1(25.62,46.78) v1(25.62,41.7) v1(25.62,39.16) v1(25.62,30.9) v1(26.26,103.29) v1(26.26,80.43) v1(26.26,77.89) v1(26.26,55.03) v1(26.7,86.47) v1(26.7,61.07) v1(26.89,72.18) v1(27.52,96.31) v1(27.52,70.91) v1(27.52,51.22) v1(27.52,48.68) v1(28.16,110.28) v1(28.8,34.08) v1(29.18,43.93) v1(29.43,89.96) v1(29.43,81.06) v1(29.43,64.56) v1(29.43,55.67) v1(29.43,41.06) v1(29.98,36.53) v1(30.06,93.77) v1(30.06,87.42) v1(30.06,68.37) v1(30.06,62.02) v1(30.58,45.73) v1(30.7,98.21) v1(30.7,96.94) v1(30.7,72.81) v1(30.7,71.54) v1(30.7,47.41) v1(31.1,100.47) v1(31.1,75.07) v1(31.34,103.29) v1(31.34,77.89) v1(31.88,30.93) v1(31.97,95.03) v1(31.97,84.24) v1(31.97,82.34) v1(31.97,69.64) v1(31.97,58.84) v1(31.97,56.94) v1(31.97,52.49) v1(31.97,34.71) v1(31.97,32.81) v1(33.88,89.96) v1(33.88,64.56) v1(35.15,103.29) v1(35.15,95.03) v1(35.15,86.78) v1(35.15,84.88) v1(35.15,82.34) v1(35.15,77.26) v1(35.15,69.64) v1(35.15,61.38) v1(35.15,59.48) v1(35.15,56.94) v1(35.15,53.12) v1(35.15,36.62) v1(35.15,35.35) v1(35.23,72.44) v1(36.98,30.93)
1#B_A4: length 17.3
  TOP w0.25: R8.1 57.84,69.27 arc(57.59,69.22) 57.39,69.08 56.92,68.62 arc(56.78,68.41) 56.73,68.17 S2.3 56.73,66.7 arc(56.56,66.27) 56.13,66.09 53.82,66.09 arc(53.58,66.14) 53.37,66.28 51.21,68.45 arc(51,68.59) 50.76,68.63 DD2.17
1#B_A5: length 17.3
  TOP w0.25: R20.1 57.84,94.67 arc(57.59,94.62) 57.39,94.48 56.92,94.02 arc(56.78,93.81) 56.73,93.57 S4.3 56.73,92.1 arc(56.56,91.67) 56.13,91.49 53.82,91.49 arc(53.58,91.54) 53.37,91.68 51.21,93.85 arc(51,93.99) 50.76,94.03 DD4.17
1#B_A6: length 14.2
  TOP w0.25: DD9.17 57.37,43.23 57.82,43.68 arc(58.02,43.82) 58.27,43.87 R32.1
1#PRD: length 15.2
  TOP w0.4: K3.12 65.31,188.93 65.31,188.96 63.27,191 arc(63.13,191.21) 63.09,191.45 63.09,194.1 arc(63.04,194.34) 62.9,194.55 59.73,197.72 arc(59.52,197.86) 59.28,197.91 56.94,197.91
1#PRM: length 22.4
  TOP w0.4: 56.94,195.37 58.65,195.37 arc(58.89,195.32) 59.1,195.18 60.99,193.28 arc(61.13,193.07) 61.18,192.83 61.18,183.2 arc(61.23,182.95) 61.37,182.75 65.31,178.8 65.31,178.77 K4.12
1#WARN: length 10.2
  TOP w0.4: K2.12 63.98,198.17 arc(63.74,198.22) 63.53,198.36 61.64,200.26 arc(61.43,200.4) 61.19,200.44 56.94,200.44
1#Z_A4: length 18
  TOP w0.25: 56.73,60.38 57.74,60.38 arc(57.98,60.43) 58.19,60.57 59.09,61.46 arc(59.29,61.6) 59.54,61.65 R9.1 ; 56.73,60.38 56.73,60.41 51.23,65.91 arc(51.03,66.05) 50.78,66.09 DD2.15 ; 56.73,60.38 S2.2
1#Z_A5: length 18
  TOP w0.25: 56.73,85.78 56.73,85.81 51.23,91.31 arc(51.03,91.45) 50.78,91.49 DD4.15 ; 56.73,85.78 57.74,85.78 arc(57.98,85.83) 58.19,85.97 59.09,86.86 arc(59.29,87) 59.54,87.05 R21.1 ; 56.73,85.78 S4.2
1#Z_A6: length 21.7
  TOP w0.25: DD9.15 59.65,40.69 60.99,39.35 arc(61.13,39.14) 61.18,38.9 61.18,34.34 arc(60.99,33.89) 60.55,33.71 R33.1
1A_A4: length 12.7
  TOP w0.25: R5.1 54.49,69.77 arc(54.45,69.58) 54.34,69.42 arc(54.23,69.25) 54.2,69.06 S2.4 53.26,67.93 arc(53.02,67.98) 52.81,68.12 51.21,69.72 arc(51,69.86) 50.76,69.9 DD2.18
1A_A5: length 12.7
  TOP w0.25: DD4.18 50.76,95.3 arc(51,95.26) 51.21,95.12 52.81,93.52 arc(53.02,93.38) 53.26,93.33 S4.4 54.2,94.46 arc(54.23,94.65) 54.34,94.82 arc(54.45,94.98) 54.49,95.17 R17.1
1A_A6: length 9
  TOP w0.25: DD9.18 51.66,44.5 53.37,46.22 arc(53.58,46.36) 53.82,46.41 R29.1
1ALARM: length 11.5
  TOP w0.4: K1.12 65.25,208.33 arc(65.01,208.29) 64.8,208.15 59.83,203.17 arc(59.62,203.03) 59.38,202.99 56.94,202.99
1Y_A4: length 17.7
  TOP w0.25: R10.1 58.9,59.11 arc(58.66,59.06) 58.45,58.92 57.56,58.03 arc(57.35,57.89) 57.11,57.84 55.3,57.84 arc(55.05,57.89) 54.85,58.03 54.38,58.49 arc(54.24,58.7) 54.2,58.94 S2.1 54.2,60.41 53.59,61.01 53.56,61.01 51.21,63.37 arc(51,63.51) 50.76,63.55 DD2.13
1Y_A5: length 17.7
  TOP w0.25: R22.1 58.9,84.51 arc(58.66,84.46) 58.45,84.32 57.56,83.43 arc(57.35,83.29) 57.11,83.24 55.3,83.24 arc(55.05,83.29) 54.85,83.43 54.38,83.89 arc(54.24,84.1) 54.2,84.34 S4.1 54.2,85.81 53.59,86.41 53.56,86.41 51.21,88.77 arc(51,88.91) 50.76,88.95 DD4.13
1Y_A6: length 14.7
  TOP w0.25: DD9.13 56.47,38.15 arc(56.71,38.11) 56.92,37.97 58.45,36.44 arc(58.66,36.3) 58.9,36.25 R34.1
#PRD: length 8.9
  TOP w0.25: X1.A23 6.38,198.73 arc(6.59,198.59) 6.83,198.54 8.85,198.54 arc(9.09,198.59) 9.3,198.73 X1.C23 R39.1
#PRM: length 8.9
  TOP w0.25: X1.A22 6.38,196.19 arc(6.59,196.05) 6.83,196 8.85,196 arc(9.09,196.05) 9.3,196.19 X1.C22 R40.1
#RE: length 4.2
  TOP w0.25: DD9.5 35.71,41.96 arc(35.47,41.92) 35.26,41.78 34.69,41.2 arc(34.48,41.06) 34.24,41.01 DD5.4
#WARN: length 8.9
  TOP w0.25: X1.A24 6.38,201.27 arc(6.59,201.13) 6.83,201.08 8.85,201.08 arc(9.09,201.13) 9.3,201.27 X1.C24 R38.1
+5BR: length 323.8
  TOP w0.25: C39.1 27.77,86.35 arc(27.81,86.59) 27.95,86.8 28.48,87.32 DD8.16 ; C37.1 25.21,56.94 arc(25,56.98) 24.83,57.09 arc(24.65,57.21) 24.45,57.25 DD1.5 23.71,57.84 arc(23.73,57.97) 23.81,58.09 arc(23.89,58.21) 23.92,58.35 R67.1 ; 34.14,38.15 28.63,38.15 28.6,38.18 R26.2 ; DD6.16 28.48,61.92 27.95,61.4 arc(27.81,61.19) 27.77,60.95 C3.1 ; C10.1 25.21,82.34 arc(25,82.38) 24.83,82.49 arc(24.65,82.61) 24.45,82.65 DD3.5 23.71,83.24 arc(23.73,83.37) 23.81,83.49 arc(23.89,83.61) 23.92,83.75 R69.1 ; X1.C14 9.3,175.87 arc(9.09,175.73) 8.85,175.68 6.83,175.68 arc(6.59,175.73) 6.38,175.87 X1.A14 6.38,178.03 arc(6.59,178.17) 6.83,178.22 8.85,178.22 arc(9.09,178.17) 9.3,178.03 X1.C14
  TOP w0.5: DD9.2 C23.1 34.09,45.77 ; DD4.2 C14.1 34.09,96.57 34.09,99.11 C13.1 34.12,100.73 arc(34.16,100.97) 34.3,101.18 34.51,101.39 ; 29.43,50.93 32.53,50.93 32.61,50.85 C21.1 33.66,50.85 33.66,50.06 arc(33.71,49.82) 33.85,49.61 33.9,49.56 arc(34.04,49.35) 34.09,49.11 34.09,48.31 ; 34.51,101.39 34.36,101.54 arc(34.15,101.68) 33.91,101.73 R13.2 R70.1 R14.2 ; 34.51,101.39 v1(37.05,101.39) ; 33.45,85.78 C11.1 v1(37.05,83.61) ; 33.45,85.78 33.48,85.81 C12.1 34.83,88.77 arc(35.04,88.91) 35.28,88.95 DD4.8 ; 33.45,85.78 30.03,85.78 arc(29.79,85.73) 29.58,85.59 29.05,85.06 arc(28.85,84.92) 28.6,84.88 C39.1 27.77,84.74 arc(27.72,84.5) 27.58,84.29 26.2,82.92 arc(26.06,82.71) 26.02,82.47 C10.1 ; v1(37.05,48.31) C22.1 34.09,48.31 ; DD5.5 33.23,43.45 arc(33.28,43.7) 33.42,43.9 33.9,44.39 arc(34.04,44.59) 34.09,44.84 34.09,45.77 ; DD9.8 34.14,38.15 33.67,37.68 arc(33.53,37.47) 33.48,37.23 C19.1 33.45,36.58 C20.1 v1(37.05,33.71) ; 34.09,48.31 34.09,45.77 ; 34.51,75.99 v1(37.05,75.99) ; 34.51,75.99 34.3,75.78 arc(34.16,75.57) 34.12,75.33 C1.1 34.09,73.71 34.09,71.17 C5.1 DD2.2 ; 34.51,75.99 34.36,76.14 arc(34.15,76.28) 33.91,76.33 R1.2 R68.1 R2.2 ; C37.1 26.02,57.07 arc(26.06,57.31) 26.2,57.52 27.58,58.89 arc(27.72,59.1) 27.77,59.34 C3.1 28.6,59.48 arc(28.85,59.52) 29.05,59.66 29.58,60.19 arc(29.79,60.33) 30.03,60.38 33.45,60.38 ; 33.45,60.38 33.48,60.41 C4.1 34.83,63.37 arc(35.04,63.51) 35.28,63.55 DD2.8 ; 33.45,60.38 C2.1 v1(37.05,58.21)
  TOP w1: X1.C14 11.14,176.95 arc(11.38,176.9) 11.59,176.76 13.3,175.06 VD27.2
  BOTTOM w0.25: 8.85,175.68 6.83,175.68 arc(6.59,175.73) 6.38,175.87 X1.A14 6.38,178.03 arc(6.59,178.17) 6.83,178.22 8.85,178.22 arc(9.09,178.17) 9.3,178.03 X1.C14 9.3,175.87 arc(9.09,175.73) 8.85,175.68
  BOTTOM w1: v1(37.05,33.71) v1(37.05,48.31) v1(37.05,58.21) v1(37.05,75.99) v1(37.05,83.61) v1(37.05,101.39) 37.05,103.66 arc(37,103.9) 36.86,104.11 23.9,117.07 arc(23.76,117.28) 23.72,117.52 23.72,169.07 arc(23.67,169.31) 23.53,169.52 16.28,176.76 arc(16.08,176.9) 15.83,176.95 X1.C14
+24BE: length 44.4
  TOP w0.5: 56.94,192.83 v1(58.64,192.83) ; v1(40.86,140.75) 40.88,140.78 C32.1 40.88,144.13 40.95,144.2 ; v1(40.86,122.34) 40.88,122.37 C34.1 40.88,125.72 AV3.6 ; C28.1 v1(58.28,207.43) ; C29.1 v1(58.28,175.05) ; AV1.6 40.91,159.46 C30.1 40.86,159.41 v1(40.86,157.9)
  TOP w1: X1.A27 X1.B27 X1.C27 11.39,209.97 arc(11.63,209.92) 11.84,209.78 12.73,208.89 arc(12.94,208.75) 13.18,208.7 VD26.2
  BOTTOM w0.45: K3.1 66.23,184.14 ; K3.1 65.03,182.93 ; K3.1 66.23,181.73 ; 66.23,191.89 K2.1 ; K2.1 65.03,193.09 ; K2.1 66.23,194.3 ; 6.5,209.97 X1.A27 6.25,210.92 ; 9.04,209.97 X1.B27 6.64,209.97 ; 66.23,173.98 K4.1 65.03,172.77 ; 66.23,202.05 K1.1 ; K1.1 65.03,203.25 ; K1.1 66.23,204.46 ; 11.58,209.97 X1.C27 9.18,209.97
_#RE_A4: length 13.7
  TOP w0.25: DD6.7 24.67,68.15 arc(24.72,67.9) 24.85,67.7 25.07,67.48 arc(25.2,67.39) 25.35,67.36 DD2.5
_#RE_A5: length 13.7
  TOP w0.25: DD4.5 25.35,92.76 arc(25.2,92.79) 25.07,92.88 24.85,93.1 arc(24.72,93.3) 24.67,93.55 DD8.7
_#TXD_A4: length 12.9
  TOP w0.25: DD2.7 35.14,64.82 arc(34.9,64.87) 34.69,65.01 34.06,65.64 arc(33.86,65.78) 33.61,65.83 26.89,65.83 arc(26.74,65.8) 26.61,65.71 26.12,65.22 arc(25.99,65.02) 25.94,64.77 DD6.12
_#TXD_A5: length 12.9
  TOP w0.25: DD4.7 35.14,90.22 arc(34.9,90.27) 34.69,90.41 34.06,91.04 arc(33.86,91.18) 33.61,91.23 26.89,91.23 arc(26.74,91.2) 26.61,91.11 26.12,90.62 arc(25.99,90.42) 25.94,90.17 DD8.12
_#TXD_A6: length 136.7
  TOP w0.25: DD9.7 29.57,39.42 arc(29.33,39.47) 29.12,39.61 28.79,39.94 arc(28.58,40.08) 28.34,40.13 R26.1 26.18,40.13 arc(25.94,40.18) 25.73,40.32 9.93,56.11 arc(9.79,56.32) 9.75,56.56 9.75,137.95 arc(9.79,138.19) 9.93,138.4 14,142.47 arc(14.14,142.68) 14.19,142.92 14.19,151.29 arc(14.24,151.53) 14.38,151.74 14.98,152.34 arc(15.12,152.54) 15.17,152.79 R28.2
_DE_A4: length 14.8
  TOP w0.25: DD2.6 35.14,66.09 arc(34.9,66.14) 34.69,66.28 arc(34.49,66.41) 34.25,66.46 25.62,66.46 arc(25.47,66.43) 25.34,66.35 24.22,65.22 arc(24.08,65.02) 24.03,64.77 DD6.9
_DE_A5: length 14.8
  TOP w0.25: DD8.9 24.03,90.17 arc(24.08,90.42) 24.22,90.62 25.34,91.75 arc(25.47,91.83) 25.62,91.86 34.25,91.86 arc(34.49,91.81) 34.69,91.68 arc(34.9,91.54) 35.14,91.49 DD4.6
_KCLR+: length 27.6
  TOP w0.45: 64.77,145.73 VD22.1 ; VD22.1 67.83,145.73 ; VD22.1 66.3,146.86 ; VD22.1 66.3,144.59 ; 57.63,147 VD20.2 58.76,145.47 ; R49.1 74.72,147.2 ; R49.1 75.7,145.47 ; R49.1 74.72,143.74 ; R49.1 73.74,145.47
  BOTTOM w0.45: R51.2 67.39,145.94 ; R51.2 65.66,144.96 ; R51.2 65.66,146.92 ; R51.2 63.94,145.94 ; R52.2 71.2,145.94 ; R52.2 69.47,144.96 ; R52.2 67.75,145.94 ; R52.2 69.47,146.92 ; C33.1 63.77,145.58 ; C33.1 62.49,146.66 ; C33.1 62.49,144.51
_KCLR-: length 26
  TOP w0.45: R56.1 53.13,141.48 ; R56.1 53.13,138.03 ; R56.1 54.11,139.75 ; R56.1 52.15,139.75
  TOP w1: v1(63.12,141.02) 63.32,141.22 arc(63.52,141.35) 63.77,141.4 VD22.2
  BOTTOM w0.45: R54.2 58.86,145.47 ; R54.2 56.9,145.47 ; R54.2 57.88,147.2 ; R54.2 57.88,143.74 ; 63.94,141.19 R51.1 ; R51.1 67.39,141.19 ; R51.1 65.66,140.21 ; R51.1 65.66,142.17 ; 69.47,140.21 R52.1 ; R52.1 67.75,141.19 ; R52.1 69.47,142.17 ; 61.21,141.82 C33.2 62.49,141.74
  BOTTOM w0.5: R55.1 52.97,136.62
_KPUSK+: length 27.6
  TOP w0.45: 57.63,164.14 VD17.2 58.76,162.61 ; 64.73,162.87 VD18.1 ; VD18.1 66.26,161.73 ; VD18.1 67.79,162.87 ; VD18.1 66.26,164.01 ; 74.68,160.89 R41.1 ; R41.1 74.68,164.34 ; R41.1 73.7,162.61 ; R41.1 75.66,162.61
  BOTTOM w0.45: C31.1 63.73,162.73 ; C31.1 62.45,161.65 ; C31.1 62.45,163.81 ; 65.62,162.11 R45.2 ; R45.2 65.62,164.06 ; R45.2 63.9,163.08 ; R45.2 67.35,163.08 ; R43.2 71.16,163.08 ; R43.2 67.71,163.08 ; R43.2 69.44,162.11 ; R43.2 69.44,164.06
_KPUSK-: length 26
  TOP w0.45: 52.11,156.9 R48.1 ; R48.1 54.07,156.9 ; R48.1 53.09,158.63 ; R48.1 53.09,155.17
  TOP w1: v1(63.09,158.17) 63.28,158.36 arc(63.48,158.5) 63.73,158.55 VD18.2
  BOTTOM w0.45: 56.86,162.61 R46.2 ; R46.2 57.84,164.34 ; R46.2 57.84,160.89 ; R46.2 58.82,162.61 ; 63.9,158.33 R45.1 ; R45.1 65.62,159.31 ; R45.1 65.62,157.36 ; R45.1 67.35,158.33 ; 62.45,158.88 C31.2 61.17,158.97 ; 69.44,157.36 R43.1 ; R43.1 69.44,159.31 ; R43.1 67.71,158.33
  BOTTOM w0.5: R47.1 52.93,153.76
_KTM+: length 27.6
  TOP w0.45: 73.74,127.05 R57.1 ; R57.1 75.7,127.05 ; R57.1 74.72,125.33 ; R57.1 74.72,128.78 ; 57.63,128.58 VD23.2 58.76,127.05 ; VD25.1 67.83,127.31 ; VD25.1 66.3,126.17 ; VD25.1 64.77,127.31 ; VD25.1 66.3,128.45
  BOTTOM w0.45: R60.2 69.47,128.5 ; R60.2 71.2,127.52 ; R60.2 69.47,126.55 ; R60.2 67.75,127.52 ; R59.2 67.39,127.52 ; R59.2 65.66,128.5 ; R59.2 63.94,127.52 ; R59.2 65.66,126.55 ; 62.49,126.09 C35.1 ; C35.1 63.77,127.17 ; C35.1 62.49,128.25
_KTM-: length 26
  TOP w0.45: 53.13,119.61 R64.1 ; R64.1 52.15,121.34 ; R64.1 53.13,123.07 ; R64.1 54.11,121.34
  TOP w1: v1(63.12,122.61) 63.32,122.8 arc(63.52,122.94) 63.77,122.99 66.3,122.99
  BOTTOM w0.45: R59.1 67.39,122.77 ; R59.1 65.66,121.8 ; R59.1 65.66,123.75 ; R59.1 63.94,122.77 ; 57.88,125.33 R62.2 ; R62.2 56.9,127.05 ; R62.2 58.86,127.05 ; R62.2 57.88,128.78 ; R60.1 69.47,123.75 ; R60.1 67.75,122.77 ; R60.1 69.47,121.8 ; 61.21,123.41 C35.2 62.49,123.32
  BOTTOM w0.5: R63.1 52.97,118.2
_RXD_A4: length 128.8
  TOP w0.25: DD2.4 31.96,68.63 arc(31.72,68.68) 31.52,68.82 29.62,70.72 arc(29.48,70.92) 29.43,71.17 29.43,74.72 arc(29.24,75.16) 28.8,75.35 18.9,75.35 arc(18.66,75.4) 18.45,75.54 14.38,79.61 arc(14.24,79.81) 14.19,80.06 14.19,135.41 arc(14.24,135.65) 14.38,135.86 18.45,139.93 arc(18.59,140.14) 18.64,140.38 18.64,149.38 arc(18.68,149.62) 18.82,149.83 19.72,150.73 arc(19.86,150.93) 19.91,151.18 19.91,163.35 arc(19.86,163.59) 19.72,163.8 18.82,164.7 arc(18.62,164.84) 18.37,164.88 16.99,164.88 arc(16.75,164.93) 16.54,165.07 16.28,165.33 arc(16.08,165.47) 15.83,165.52 14.44,165.52 arc(14.26,165.59) 14.19,165.77 14.19,170.43 arc(14.24,170.67) 14.38,170.88 15.02,171.53 arc(15.13,171.69) R3.2
_RXD_A5: length 97.9
  TOP w0.25: DD4.4 31.96,94.03 arc(31.72,94.08) 31.52,94.22 29.62,96.12 arc(29.48,96.32) 29.43,96.57 R13.1 arc(29.2,99.82) 29,99.95 28.39,100.56 arc(28.19,100.7) 27.94,100.75 18.9,100.75 arc(18.66,100.8) 18.45,100.94 17.55,101.83 arc(17.41,102.04) 17.37,102.28 17.37,134.14 arc(17.41,134.38) 17.55,134.59 21.62,138.66 arc(21.76,138.87) 21.81,139.11 21.81,164.62 arc(21.76,164.86) 21.62,165.07 17.55,169.14 arc(17.35,169.28) 17.1,169.33 R15.2
_RXD_A6: length 145
  TOP w0.25: DD9.4 35.84,43.23 arc(35.59,43.19) 35.39,43.05 34.49,42.15 arc(34.28,42.01) 34.04,41.96 32.61,41.96 arc(32.16,42.15) 31.97,42.6 31.97,43.87 arc(31.78,44.32) 31.34,44.5 30.04,44.5 29.62,44.93 arc(29.48,45.13) 29.43,45.37 R25.1 arc(29.2,49.02) 29,49.15 28.39,49.76 arc(28.19,49.9) 27.94,49.95 18.9,49.95 arc(18.66,50) 18.45,50.14 11.2,57.38 arc(11.06,57.59) 11.02,57.83 11.02,136.68 arc(11.06,136.92) 11.2,137.13 15.27,141.2 arc(15.41,141.41) 15.46,141.65 15.46,150.02 arc(15.51,150.26) 15.65,150.47 17.81,152.63 arc(17.95,152.84) 18,153.08 18,160.18 arc(17.95,160.42) 17.81,160.63 16.92,161.52 arc(16.71,161.66) 16.47,161.71 R27.2
ALARM: length 8.9
  TOP w0.25: X1.A25 6.38,203.81 arc(6.59,203.67) 6.83,203.62 8.85,203.62 arc(9.09,203.67) 9.3,203.81 X1.C25 R37.1
CLEAR: length 8.9
  TOP w0.25: X1.A20 6.38,191.11 arc(6.59,190.97) 6.83,190.92 8.85,190.92 arc(9.09,190.97) 9.3,191.11 X1.C20 R53.1
CTRLTM: length 8.9
  TOP w0.25: X1.A19 6.38,188.57 arc(6.59,188.43) 6.83,188.38 8.85,188.38 arc(9.09,188.43) 9.3,188.57 X1.C19 R61.1
DE: length 140.5
  TOP w0.25: DD9.6 35.46,40.69 arc(35.21,40.65) 35.01,40.51 34.69,40.19 arc(34.48,40.05) 34.24,40 32.5,40 arc(32.15,40.15) 32,40.5 32,41.3 arc(31.95,41.54) 31.81,41.75 31.78,41.78 arc(31.58,41.92) 31.33,41.96 DD5.2 29.42,41.96 arc(29.18,42.01) 28.98,42.15 28.25,42.87 arc(28.05,43.01) 27.8,43.06 R65.2 24.52,43.06 arc(24.28,43.11) 24.07,43.25 10.57,56.75 arc(10.43,56.95) 10.38,57.2 10.38,137.32 arc(10.43,137.56) 10.57,137.77 14.64,141.84 arc(14.78,142.04) 14.83,142.29 14.83,150.65 arc(14.87,150.89) 15.01,151.1 16.54,152.63 arc(16.68,152.84) 16.73,153.08 16.73,158.53 arc(16.54,158.98) 16.09,159.17 R66.2
ENDR: length 14.8
  TOP w0.25: X1.A6 6.38,155.55 arc(6.59,155.41) 6.83,155.36 8.85,155.36 arc(9.09,155.41) 9.3,155.55 X1.C6 11.83,155.18 arc(12.04,155.04) 12.28,154.99 13.55,154.99 arc(14,155.18) 14.19,155.63 14.19,157.73 13.93,157.99 13.93,158.2 13.39,158.74 arc(13.26,158.94) R66.1
KALARM+: length 23.9
  TOP w1: X2.16 86.72,208.33 arc(86.49,208.29) 86.29,208.16 arc(86.1,208.03) 85.87,207.98 VD13.1 82.49,207.98 arc(82.25,208.03) 82.04,208.17 78.89,211.32 arc(78.68,211.46) 78.44,211.51 72.31,211.51 arc(72.07,211.46) 71.86,211.32 71.53,210.99 arc(71.39,210.78) 71.34,210.54 71.34,208.36 K1.10
KALARM-: length 20.2
  TOP w1: X2.15 86.47,203.25 arc(86.23,203.3) 86.02,203.44 86.02,203.44 arc(85.83,203.56) 85.62,203.61 VD13.2 82.05,203.61 arc(81.8,203.65) 81.6,203.79 79.85,205.53 arc(79.65,205.67) 79.41,205.72 74.85,205.72 arc(74.61,205.77) 74.4,205.91 74.07,206.24 arc(73.93,206.45) 73.88,206.69 73.88,208.3 K1.9
KCLEAR+: length 13.6
  TOP w0.45: 78.49,145.47 R49.2 ; R49.2 80.45,145.47 ; R49.2 79.47,147.2 ; R49.2 79.47,143.74
  BOTTOM w1: 83.41,145.84 84.76,147.19 arc(84.96,147.33) 85.21,147.37 X2.4
KCLEAR-: length 15
  TOP w0.45: 58.86,139.75 R56.2 56.9,139.75
  TOP w0.5: R55.2 58.01,139.45 arc(57.97,139.62) R56.2
  TOP w1: 83.41,136.94 88.57,142.11 arc(88.77,142.25) 89.02,142.29 X2.3
KCTRLTM+: length 18.6
  TOP w0.45: R57.2 79.47,128.78 ; R57.2 80.45,127.05 ; R57.2 78.49,127.05 ; R57.2 79.47,125.33
  BOTTOM w1: 83.41,128.06 83.41,130.97 arc(83.45,131.21) 83.59,131.42 89.2,137.03 arc(89.41,137.17) 89.65,137.21 X2.2
KCTRLTM-: length 20.6
  TOP w0.5: R63.2 58.01,121.21 R64.2
  TOP w1: 83.41,117.9 90.84,125.33 arc(90.98,125.54) 91.02,125.78 X2.1
KDR_COM: length 56.3
  TOP w0.45: C24.2 48.88,48.22 ; VD11.1 78.01,31.17 ; VD11.1 76.8,29.57 ; VD11.1 76.8,32.77 ; VD11.1 75.59,31.17 ; C26.2 47.61,50.76 ; C26.2 46.55,49.58 ; C26.2 47.61,48.41 ; VD9.1 78.01,48.95 ; VD9.1 76.8,50.55 ; VD9.1 76.8,47.35 ; VD9.1 75.59,48.95 ; VD10.1 76.8,44.2 ; VD10.1 76.8,41 ; VD10.1 78.01,42.6 ; VD10.1 75.59,42.6 ; 46.59,32.44 C25.2 ; C25.2 47.64,30.64 ; C25.2 47.64,34.24 ; 60.21,45.26 R36.1 ; R36.1 60.21,47.56 ; R36.1 59.3,46.41 ; R36.1 61.11,46.41 ; X3.4 91.02,41.76 ; X3.4 92.73,40.06 ; X3.4 91.02,38.36 ; X3.4 89.32,40.06 ; VD12.1 78.01,37.52 ; VD12.1 76.8,39.12 ; VD12.1 75.59,37.52 ; VD12.1 76.8,35.92 ; 48.88,34.44 C27.2 ; DD9.20 46.25,47.8 ; 46.25,34.86 DD9.11 ; DD9.16 47.8,41.96 ; DD9.14 47.8,39.42
  BOTTOM w0.35: 91.02,38.11 X3.4 ; X3.4 92.98,40.06 ; X3.4 89.07,40.06 ; X3.4 91.02,42.01
  vias: v1(46.03,50.73) v1(45.94,33.07) v1(46.03,30.73) v1(47.43,48.13) v1(48.48,41.96) v1(48.48,39.42) v1(49.23,34.13) v1(52.03,50.73) v1(52.29,48.31) v1(52.29,46.41) v1(52.29,36.62) v1(52.29,34.08) v1(52.26,30.49) v1(54.88,39.43) v1(55.47,44.5) v1(55.47,41.96) v1(55.47,33.71) v1(55.47,30.53) v1(59.28,50.22) v1(59.28,42.6) v1(59.28,38.79) v1(59.28,29.9) v1(64.36,50.22) v1(64.36,45.14) v1(64.36,36.25) v1(64.36,29.9) v1(71.34,50.22) v1(71.34,45.14) v1(71.34,36.25) v1(71.34,32.44) v1(71.34,29.9) v1(78.96,49.58) v1(78.96,48.31) v1(78.96,43.23) v1(78.96,41.96) v1(78.96,38.15) v1(78.96,36.88) v1(78.96,31.8) v1(78.96,30.53) v1(82.77,45.77) v1(82.77,40.06) v1(82.77,34.34) v1(88.48,47.68) v1(88.48,42.6) v1(88.48,37.52) v1(88.48,32.44)
KLN_COM: length 60.1
  TOP w0.25: 55.8,98.5 55.8,98.48
  TOP w0.45: 76.8,91.8 VD6.1 ; VD6.1 76.8,95 ; VD6.1 75.59,93.4 ; VD6.1 78.01,93.4 ; 46.59,83.24 C16.2 ; C16.2 47.64,85.04 ; C16.2 47.64,81.44 ; 76.8,86.72 VD8.1 ; VD8.1 78.01,88.32 ; VD8.1 75.59,88.32 ; VD8.1 76.8,89.92 ; VD7.1 78.01,81.97 ; VD7.1 75.59,81.97 ; VD7.1 76.8,80.37 ; VD7.1 76.8,83.57 ; 48.88,85.24 C15.2 ; 47.8,97.84 DD4.20 46.25,98.6 ; 60.21,96.06 R24.1 ; R24.1 59.3,97.21 ; R24.1 60.21,98.36 ; R24.1 61.11,97.21 ; 91.02,89.16 X3.14 ; X3.14 89.32,90.86 ; X3.14 91.02,92.56 ; X3.14 92.73,90.86 ; C18.2 52.31,97.21 ; C18.2 51.26,96.03 ; C18.2 51.26,98.39 ; 46.55,100.38 C17.2 ; C17.2 47.61,101.56 ; C17.2 47.61,99.21 ; 75.59,99.75 VD5.1 ; VD5.1 78.01,99.75 ; VD5.1 76.8,101.35 ; VD5.1 76.8,98.15 ; 46.25,85.66 DD4.11 ; DD4.14 47.8,90.22 ; DD4.16 47.8,92.76
  BOTTOM w0.45: X3.14 92.98,90.86 ; X3.14 91.02,92.81 ; X3.14 91.02,88.91 ; X3.14 89.07,90.86
  vias: v1(46.03,101.53) v1(45.94,83.87) v1(46.03,81.53) v1(47.62,98.93) v1(48.48,92.76) v1(48.48,90.22) v1(49.23,84.92) v1(51.02,99.11) v1(52.03,101.63) v1(52.29,85.78) v1(52.93,98.48) v1(52.93,95.3) v1(52.93,81.33) v1(54.2,90.22) v1(55.47,92.76) v1(55.47,84.51) v1(57.37,87.05) v1(58.01,101.02) v1(58.01,98.48) v1(58.01,95.94) v1(58.01,93.4) v1(58.01,80.7) v1(59.28,82.6) v1(61.18,92.76) v1(61.18,88.95) v1(63.72,101.02) v1(63.72,98.48) v1(63.72,94.03) v1(63.72,90.86) v1(63.72,87.05) v1(63.72,83.87) v1(63.72,80.7) v1(71.34,101.02) v1(71.34,96.57) v1(71.34,93.4) v1(71.34,90.86) v1(71.34,87.05) v1(71.34,83.24) v1(71.34,80.7) v1(75.15,101.02) v1(75.15,94.03) v1(75.15,87.05) v1(75.15,80.7) v1(78.96,100.38) v1(78.96,99.11) v1(78.96,94.03) v1(78.96,92.76) v1(78.96,88.95) v1(78.96,87.68) v1(78.96,82.6) v1(78.96,81.33) v1(82.77,96.57) v1(82.77,90.86) v1(82.77,85.14) v1(88.48,98.48) v1(88.48,93.4) v1(88.48,88.32) v1(88.48,83.24) v1(92.93,98.48) v1(92.93,93.4) v1(92.93,88.32) v1(92.93,83.24)
KPRD+: length 14.8
  TOP w1: K3.8 81.36,188.01 arc(81.59,187.97) 81.79,187.84 arc(81.98,187.71) 82.21,187.66 VD15.1 85.62,187.66 arc(85.83,187.7) 86.02,187.83 86.02,187.83 arc(86.23,187.97) 86.47,188.01 X2.12
KPRD-: length 20.4
  TOP w1: K3.9 73.85,186.41 73.88,186.38 73.88,186.11 arc(74.07,185.66) 74.52,185.47 79.33,185.47 arc(79.57,185.43) 79.78,185.29 81.56,183.51 arc(81.76,183.37) 82.01,183.32 82.05,183.29 VD15.2 85.87,183.29 arc(86.1,183.24) 86.29,183.11 arc(86.49,182.98) 86.72,182.93 X2.11
KPRM+: length 14.8
  TOP w1: K4.8 81.36,177.85 arc(81.59,177.81) 81.79,177.68 arc(81.98,177.55) 82.21,177.5 VD16.1 85.87,177.5 arc(86.1,177.55) 86.29,177.68 arc(86.49,177.81) 86.72,177.85 X2.10
KPRM-: length 20.4
  TOP w1: X2.9 86.72,172.77 arc(86.49,172.82) 86.29,172.95 arc(86.1,173.08) 85.87,173.13 VD16.2 82.05,173.13 arc(81.8,173.17) 81.6,173.31 79.78,175.13 arc(79.58,175.27) 79.33,175.31 74.52,175.31 arc(74.07,175.5) 73.88,175.95 73.88,176.22 73.85,176.25 K4.9
KPUSK+: length 13.2
  TOP w0.45: R41.2 79.43,164.34 ; R41.2 80.41,162.61 ; R41.2 79.43,160.89 ; R41.2 78.45,162.61
  BOTTOM w1: 83.41,157.9 83.77,157.53 X2.6
KPUSK-: length 11.2
  TOP w0.5: R48.2 57.97,156.77 R47.2
  TOP w1: 83.41,153.46 86.32,153.46 arc(86.56,153.41) 86.77,153.27 87.39,152.64 arc(87.6,152.5) 87.84,152.45 X2.5
KRXDR+: length 4.8
  TOP w0.5: FB9.2 87.74,48.95 arc(87.99,49) 88.19,49.14 89.09,50.03 arc(89.3,50.17) 89.54,50.22 X3.6
KRXDR-: length 6.2
  TOP w0.5: FB10.2 86.69,43.74 arc(86.73,43.98) 86.87,44.19 87.64,44.95 87.66,44.95 arc(87.87,45.09) 88.11,45.14 X3.5
KRXLN+: length 4.8
  TOP w0.5: X3.16 89.54,101.02 arc(89.3,100.97) 89.09,100.83 88.19,99.94 arc(87.99,99.8) 87.74,99.75 FB5.2
KRXLN-: length 6.3
  TOP w0.5: X3.15 88.11,95.94 arc(87.87,95.89) 87.66,95.75 87.21,95.3 87.19,95.3 arc(86.83,95.16) 86.69,94.8 FB6.2
KRXTM+: length 4.8
  TOP w0.5: X3.11 89.54,75.62 arc(89.3,75.57) 89.09,75.43 88.19,74.54 arc(87.99,74.4) 87.74,74.35 FB1.2
KRXTM-: length 6.2
  TOP w0.5: FB2.2 86.69,69.4 87.19,69.9 87.21,69.9 87.66,70.35 arc(87.87,70.49) 88.11,70.54 X3.10
KTM_COM: length 60
  TOP w0.45: 75.59,62.92 VD4.1 ; VD4.1 76.8,64.52 ; VD4.1 78.01,62.92 ; VD4.1 76.8,61.32 ; R12.1 61.11,71.81 ; R12.1 60.21,70.66 ; R12.1 59.3,71.81 ; R12.1 60.21,72.96 ; DD2.16 47.8,67.36 ; X3.9 91.02,67.16 ; X3.9 89.32,65.46 ; X3.9 92.73,65.46 ; X3.9 91.02,63.76 ; 46.55,74.98 C8.2 ; C8.2 47.61,76.16 ; C8.2 47.61,73.81 ; 46.25,60.26 DD2.11 ; DD2.14 47.8,64.82 ; 75.59,56.57 VD3.1 ; VD3.1 76.8,58.17 ; VD3.1 78.01,56.57 ; VD3.1 76.8,54.97 ; 46.25,73.2 DD2.20 47.8,72.44 ; 47.64,56.04 C7.2 ; C7.2 47.64,59.64 ; C7.2 46.59,57.84 ; VD1.1 76.8,75.95 ; VD1.1 75.59,74.35 ; VD1.1 78.01,74.35 ; VD1.1 76.8,72.75 ; 76.8,66.4 VD2.1 ; VD2.1 76.8,69.6 ; VD2.1 75.59,68 ; VD2.1 78.01,68 ; 51.26,70.63 C9.2 ; C9.2 51.26,72.99 ; C9.2 52.31,71.81 ; 48.88,59.84 C6.2
  BOTTOM w0.45: 91.02,63.51 X3.9 ; X3.9 91.02,67.41 ; X3.9 89.07,65.46 ; X3.9 92.98,65.46
  vias: v1(46.03,76.13) v1(45.94,58.47) v1(46.03,56.13) v1(47.62,73.53) v1(48.48,67.36) v1(48.48,64.82) v1(49.23,59.52) v1(51.02,73.71) v1(52.03,76.23) v1(52.29,60.38) v1(52.93,73.08) v1(52.93,69.9) v1(52.93,55.93) v1(54.2,64.82) v1(55.47,67.36) v1(55.47,59.11) v1(57.37,61.65) v1(58.01,75.62) v1(58.01,73.08) v1(58.01,70.54) v1(58.01,68) v1(58.01,55.3) v1(59.28,57.2) v1(61.18,67.36) v1(61.18,63.55) v1(63.72,75.62) v1(63.72,73.08) v1(63.72,68.63) v1(63.72,65.46) v1(63.72,61.65) v1(63.72,58.47) v1(63.72,55.3) v1(71.34,75.62) v1(71.34,71.17) v1(71.34,68) v1(71.34,65.46) v1(71.34,61.65) v1(71.34,57.84) v1(71.34,55.3) v1(75.15,75.62) v1(75.15,68.63) v1(75.15,61.65) v1(75.15,55.3) v1(78.96,74.98) v1(78.96,73.71) v1(78.96,68.63) v1(78.96,67.36) v1(78.96,63.55) v1(78.96,62.28) v1(78.96,57.2) v1(78.96,55.93) v1(82.77,71.17) v1(82.77,65.46) v1(82.77,59.74) v1(88.48,73.08) v1(88.48,68) v1(88.48,62.92) v1(88.48,57.84) v1(92.93,73.08) v1(92.93,68) v1(92.93,62.92) v1(92.93,57.84)
